# Altium PCB PCB.PcbDoc
Units mil, origin at the board's own origin, x right, y up, seen from the top; angles counter-clockwise.
Board outline 3149.61 x 3897.64 mil, 2 copper layers (Top Layer, Bottom Layer); 87 components, 90 nets, 304 pads, 46 vias.
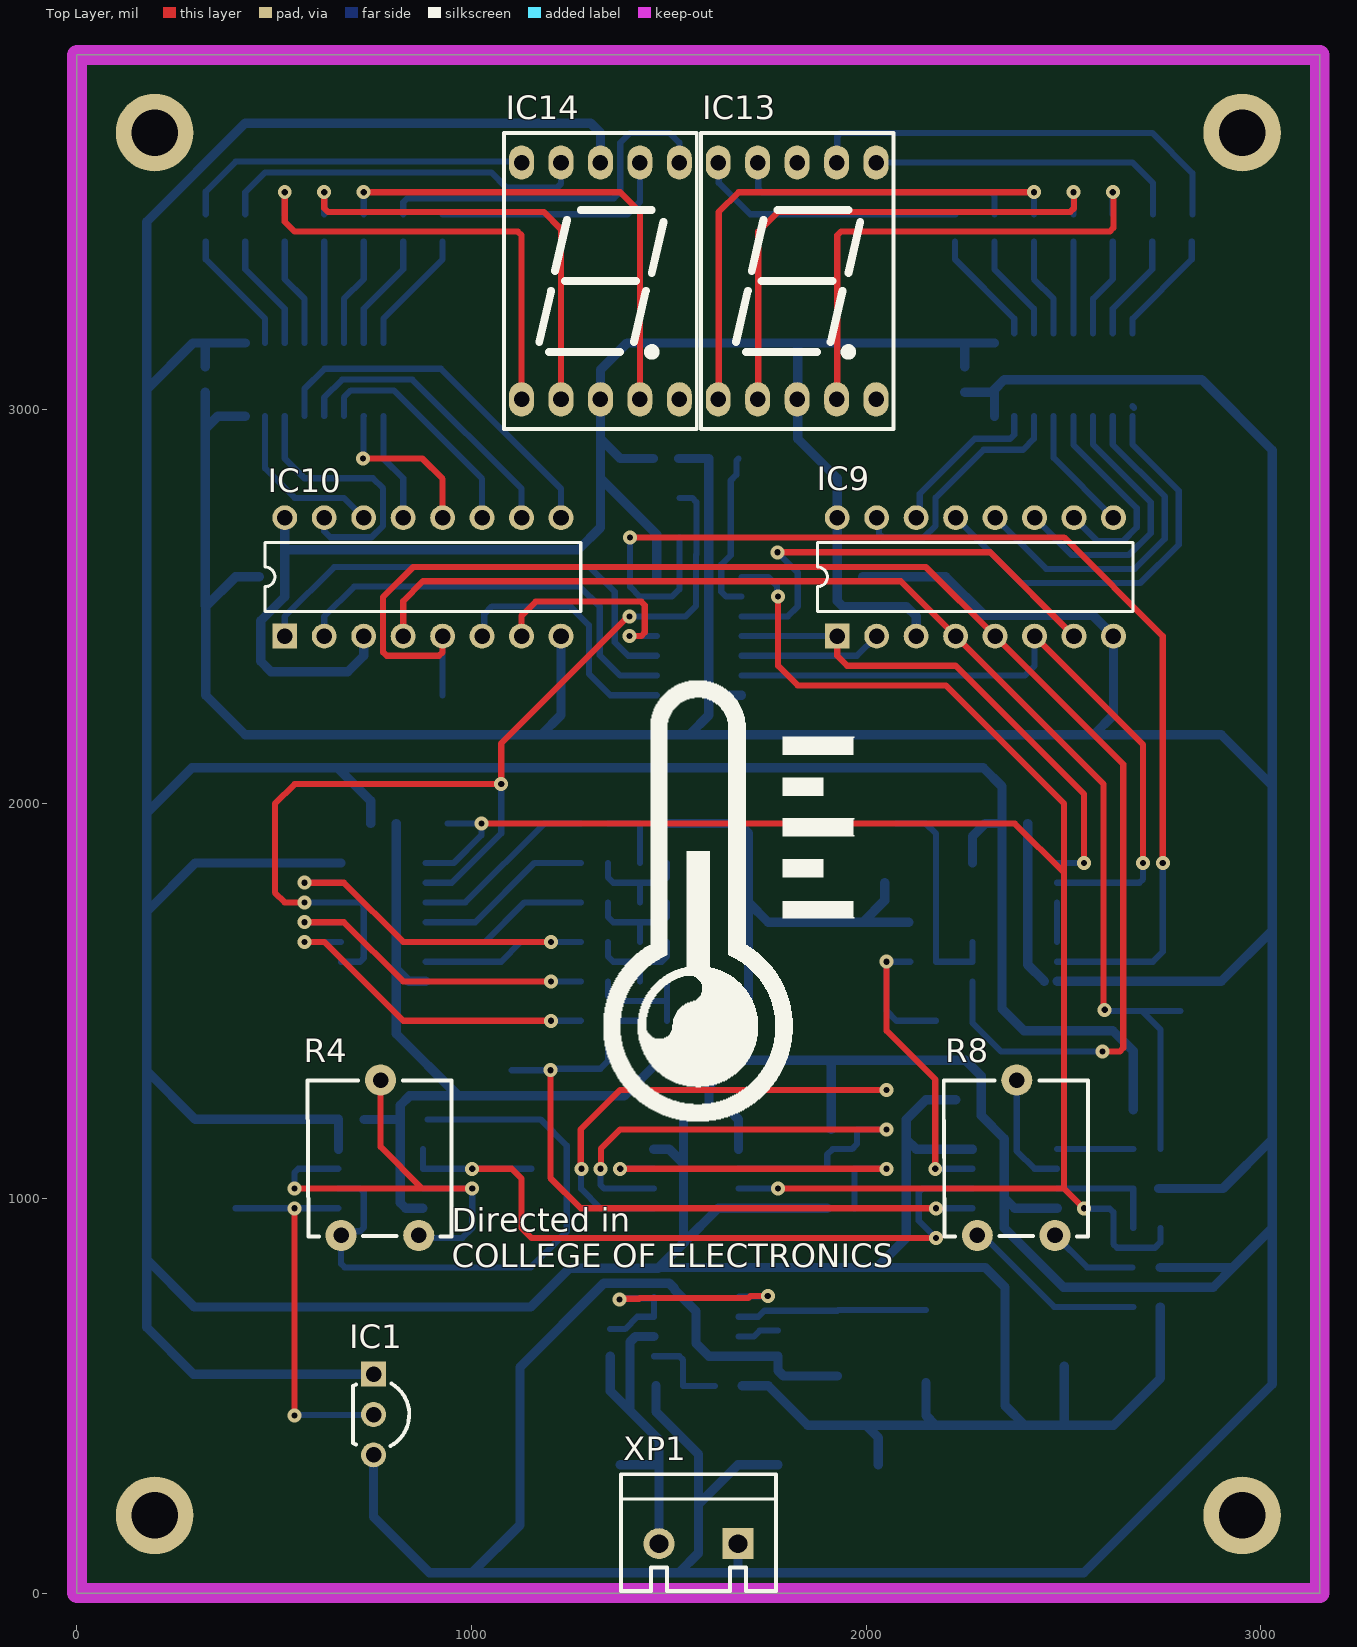
[diagram p0: Top Layer view]
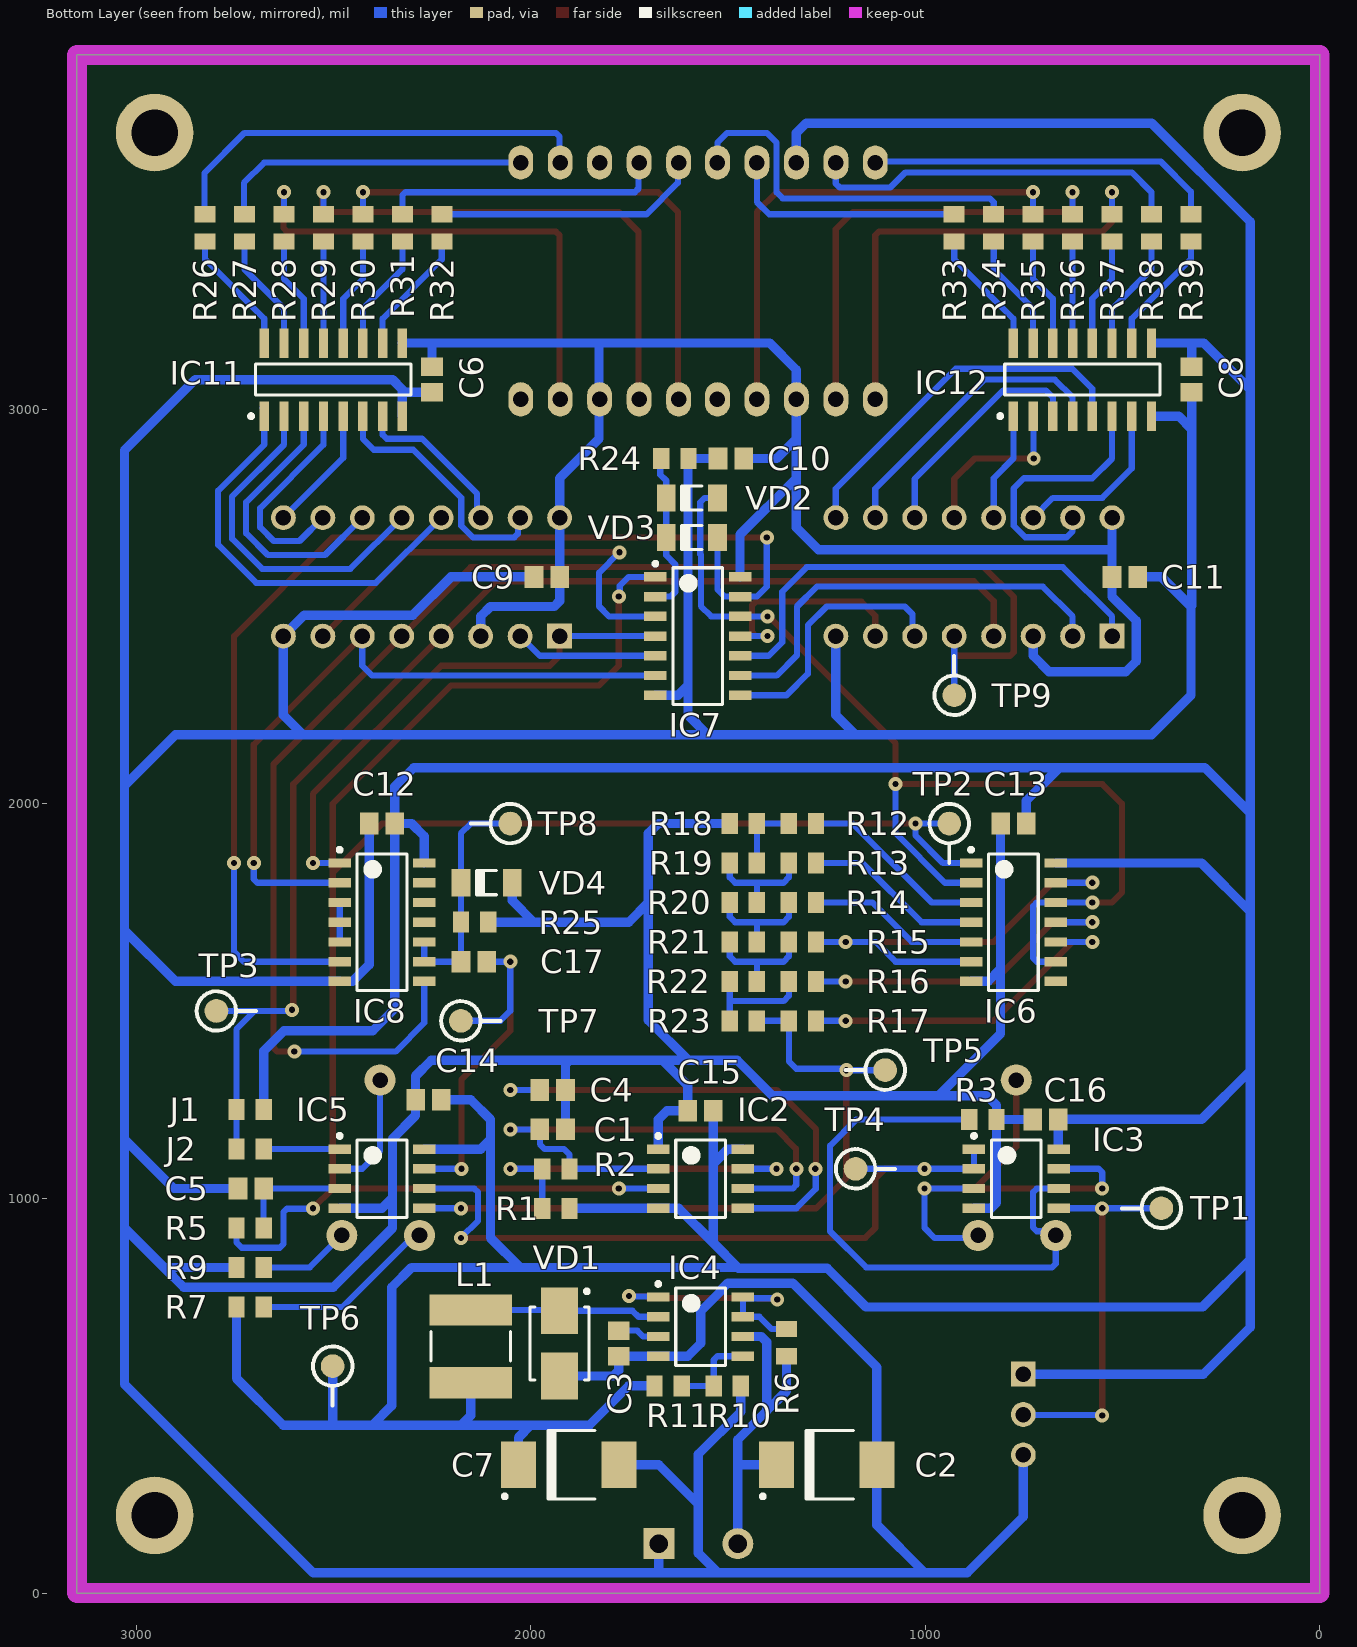
[diagram p1: Bottom Layer view, seen from below]
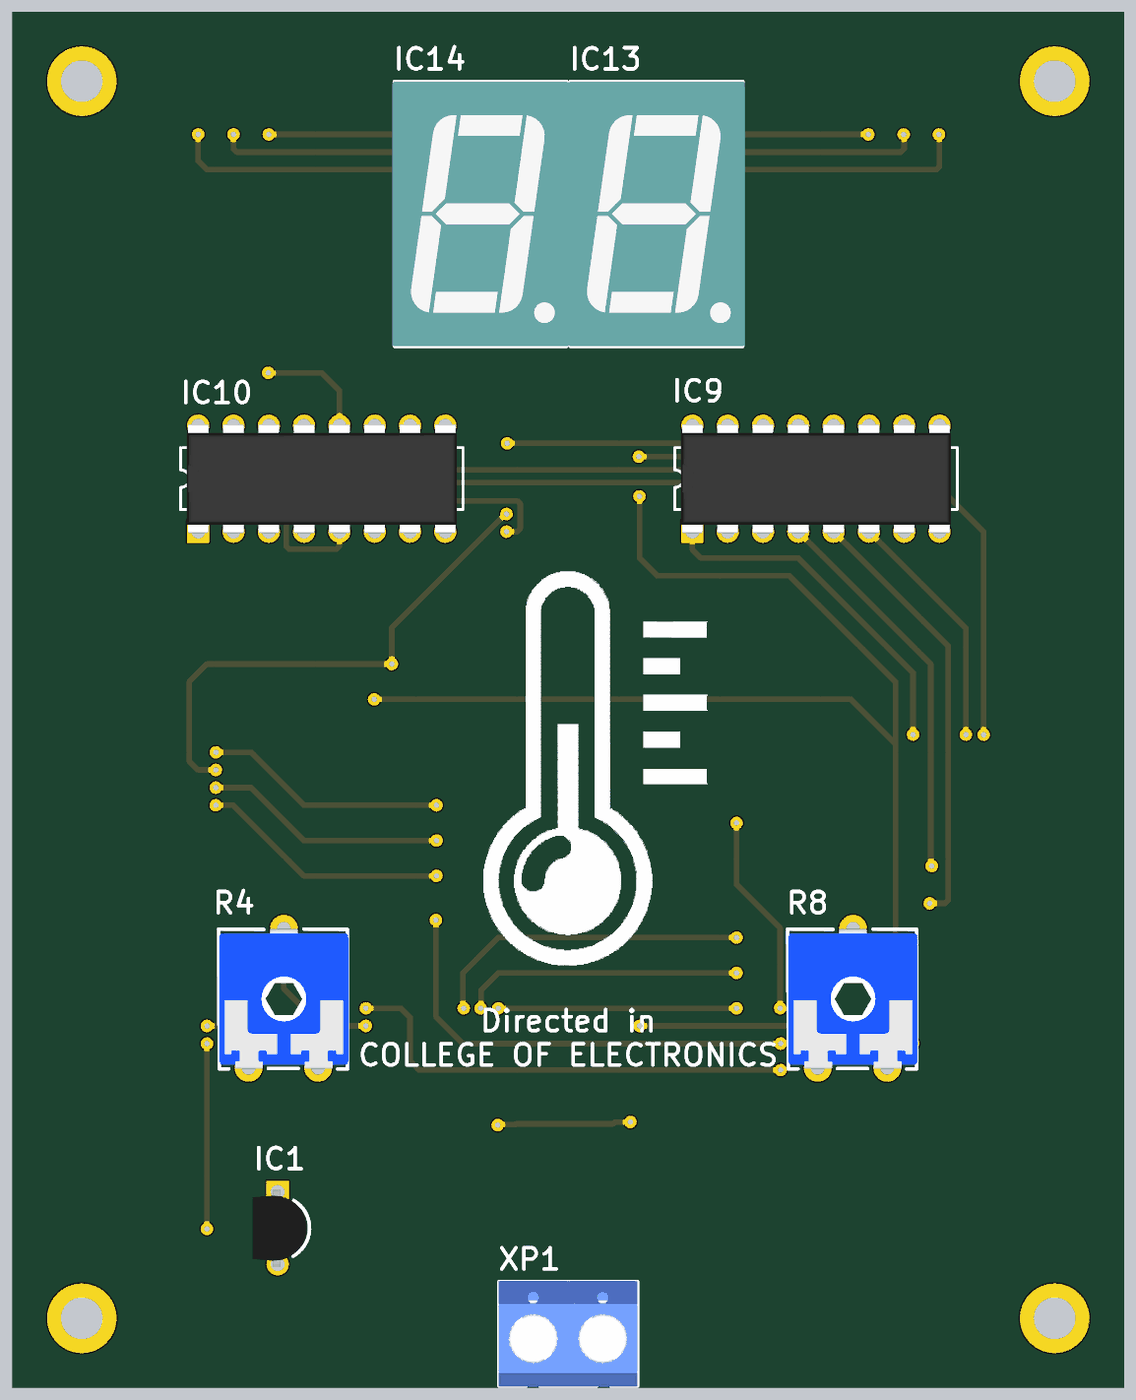
[diagram p2: 3D render of the assembled board from above, using the file's embedded part models]
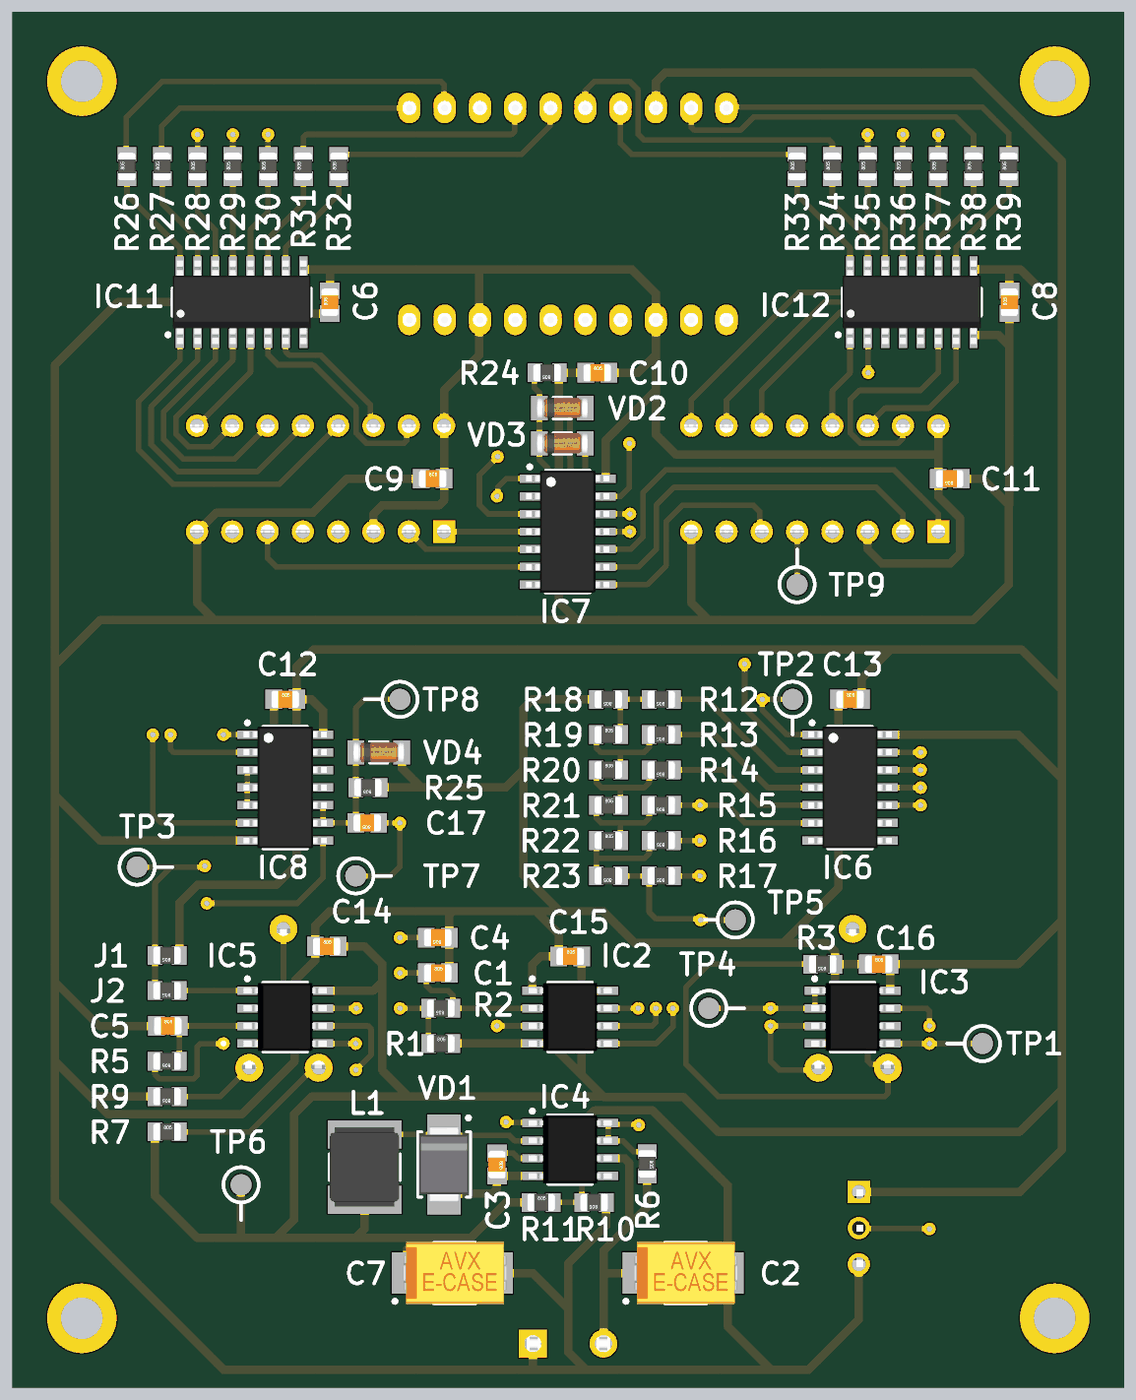
[diagram p3: 3D render of the assembled board from below, using the file's embedded part models]

## Layer stack, top to bottom
Top Solder: solder mask 0.4, Solder Resist, Dk 3.5
Top Layer: signal copper 1.4
Dielectric 1: dielectric 12.6, FR-4, Dk 4.8
Bottom Layer: signal copper 1.4
Bottom Solder: solder mask 0.4, Solder Resist, Dk 3.5

## Board outline
0,0 0,3897.64 3149.61,3897.64 3149.61,0

## Design rules (kind name [scope] priority, off if disabled: settings)
AcuteAngle [All] p1: minimum=6.00000000000000E+0001 checktracksonly=FALSE
BoardOutlineClearance [All] p1: gap=39.37 ignorepadtopadclearanceinfootprint=FALSE
Clearance Clearance_1 [InComponent('IC13') vs InComponent('IC14')] p1: gap=0 ignorepadtopadclearanceinfootprint=FALSE
Clearance [All] p2: gap=11.81 ignorepadtopadclearanceinfootprint=FALSE
HoleSize [All] p1: absolutevalues=TRUE maxlimit=39.37 minlimit=15.75 maxpercent=80.000 minpercent=20.000
MinimumAnnularRing [All] p1: minimumring=19.68
PolygonConnect [All] p1: connectstyle=Relief reliefconductorwidth=10 reliefentries=4 polygonreliefangle="90 Angle" airgapwidth=10
RoomDefinition Sheet1 [InComponentClass('Sheet1')] p1: confinementstyle=ConfineIn formatcopy=TRUE lockcomponents=FALSE outline 0,0 10200,0 10200,10400 0,10400
RoutingPriority RoutingPriority_1 [InNetClass('PWR')] p1: routingpriority=1
RoutingPriority [All] p2: routingpriority=0
RoutingTopology RoutingTopology_1 [InNetClass('PWR')] p1: topology=Daisy_Simple
RoutingTopology [All] p2: topology=Shortest
RoutingVias [All] p1: holewidth=15.75 width=35.43 viastyle="Through Hole" minholewidth=15.75 minwidth=35.43 maxholewidth=15.75 maxwidth=35.43
SMDEntry [All] p1: side=TRUE corner=FALSE anyangle=FALSE
SMDToCorner [All] p1: distance=98425
SolderMaskExpansion [All] p1: expansion=4 istentingtop=FALSE
UnRoutedNet [All] p1: checkbadconnections=TRUE
Width Width_PWR [InNetClass('PWR')] p1: maxlimit=23.62 minlimit=23.62 preferedwidth=23.62
Width [All] p2: maxlimit=15.75 minlimit=15.75 preferedwidth=15.75
26 further rules are at their usual default settings.

## Classes and differential pairs
net class PWR: GND VCC Vin

## Components (designator, comment, footprint, x,y, rotation, side; value= is the part's Value field where it differs from the comment)
C1 "0.1uF" CAP0805 1944.09,1175 r180 bottom
C2 "100uF" CAP-SMD-E 1241.57,325 r0 bottom
C3 "470pF" CAP0805 1776.57,632.48 r270 bottom
C4 "10n" CAP0805 1944.09,1275 r0 bottom
C5 "0.1uF" CAP0805 2709.05,1025 r180 bottom
C6 "0.1uF" CAP0805 2250,3075 r90 bottom
C7 "470uF" CAP-SMD-E 1895.67,325 r0 bottom
C8 "0.1uF" CAP0805 325,3075 r90 bottom
C9 "0.1uF" CAP0805 1959.06,2575 r180 bottom
C10 "0.1uF" CAP0805 1492.52,2875 r180 bottom
C11 "0.1uF" CAP0805 494.1,2575 r0 bottom
C12 "0.1uF" CAP0805 2376.57,1950 r180 bottom
C13 "0.1uF" CAP0805 776.57,1950 r180 bottom
C14 "0.1uF" CAP0805 2259.05,1250 r180 bottom
C15 "0.1uF" CAP0805 1569.29,1221.99 r180 bottom
C16 "0.1uF" CAP0805 695.38,1200.29 r180 bottom
C17 "0.1uF" CAP0805 2144.09,1600 r0 bottom
IC1 "LM35" TO92 751.57,452.36 r270 top
IC2 "NE555" SOIC8 1569.29,1050 r180 bottom
IC3 "LM358" SOIC8 769.29,1050 r180 bottom
IC4 "MC34063" SOIC8 1569.29,675 r180 bottom
IC5 "LM358" SOIC8 2376.57,1050 r180 bottom
IC6 "74393" SOIC-14(3.9mm) 776.57,1700 r180 bottom
IC7 "74393" SOIC-14(3.9mm) 1576.57,2425 r180 bottom
IC8 "7400" SOIC-14(3.9mm) 2376.57,1700 r180 bottom
IC9 "4511" DIP16 2276.57,2575 r90 top
IC10 "4511" DIP16 876.57,2575 r90 top
IC11 "ULN2003ADR" SOIC16 2500,3075 r90 bottom
IC12 "ULN2003ADR" SOIC16 601.57,3075 r90 bottom
IC13 "SA05-11EWA" SA05-11EWA 1825,3325 r0 top
IC14 "SA05-11EWA" SA05-11EWA 1326.57,3325 r0 top
J1 "Jumper" RES0805 2711.02,1225 r0 bottom
J2 "Jumper" RES0805 2711.02,1125 r0 bottom
L1 "220uH" LQH55 2151.57,625 r270 bottom
R1 "1.2K" RES0805 1936.02,975 r180 bottom
R2 "6.8K" RES0805 1936.02,1075 r0 bottom
R3 "1K" RES0805 853.74,1200 r0 bottom
R4 "10k" POT 769.29,1106.3 r0 top
R5 "10K" RES0805 2711.02,925 r0 bottom
R6 "0.33" RES0805 1351.57,634.45 r270 bottom
R7 "15K" RES0805 2711.02,725 r180 bottom
R8 "10k" POT 2381.57,1106.3 r0 top
R9 "15K" RES0805 2711.02,825 r0 bottom
R10 "1.2K" RES0805 1501.57,525 r0 bottom
R11 "3.8K" RES0805 1651.57,525 r180 bottom
R12 "2K" RES0805 1311.02,1950 r0 bottom
R13 "2K" RES0805 1311.02,1850 r0 bottom
R14 "2K" RES0805 1311.02,1750 r0 bottom
R15 "2K" RES0805 1311.02,1650 r0 bottom
R16 "2K" RES0805 1311.02,1550 r0 bottom
R17 "2K" RES0805 1311.02,1450 r0 bottom
R18 "2K" RES0805 1461.02,1950 r0 bottom
R19 "1K" RES0805 1461.02,1850 r180 bottom
R20 "1K" RES0805 1461.02,1750 r180 bottom
R21 "1K" RES0805 1461.02,1650 r180 bottom
R22 "1K" RES0805 1461.02,1550 r180 bottom
R23 "1K" RES0805 1461.02,1450 r0 bottom
R24 "1K" RES0805 1634.45,2875 r0 bottom
R25 "10K" RES0805 2142.13,1700 r0 bottom
R26 "220" RES0805 2825,3459.45 r90 bottom
R27 "220" RES0805 2725,3459.45 r90 bottom
R28 "220" RES0805 2625,3459.45 r90 bottom
R29 "220" RES0805 2525,3459.45 r90 bottom
R30 "220" RES0805 2425,3459.45 r90 bottom
R31 "220" RES0805 2325,3459.45 r90 bottom
R32 "220" RES0805 2225,3459.45 r90 bottom
R33 "220" RES0805 926.57,3459.45 r90 bottom
R34 "220" RES0805 826.57,3459.45 r90 bottom
R35 "220" RES0805 726.57,3459.45 r90 bottom
R36 "220" RES0805 626.57,3459.45 r90 bottom
R37 "220" RES0805 526.57,3459.45 r90 bottom
R38 "220" RES0805 426.57,3459.45 r90 bottom
R39 "220" RES0805 326.57,3459.45 r90 bottom
TP1 "TestPoint" TP 401.57,975 r0 bottom
TP2 "TestPoint" TP 939.07,1950 r270 bottom
TP3 "TestPoint" TP 2796.14,1475 r180 bottom
TP4 "TestPoint" TP 1176.57,1075 r180 bottom
TP5 "TestPoint" TP 1101.58,1325 r0 bottom
TP6 "TestPoint" TP 2501.57,575 r270 bottom
TP7 "TestPoint" TP 2176.57,1450 r180 bottom
TP8 "TestPoint" TP 2051.57,1950 r0 bottom
TP9 "TestPoint" TP 926.57,2275 r90 bottom
VD1 "10BQ040" DIODESMB 1926.57,632.68 r270 bottom
VD2 "LL4148" DIOMELF 1591.54,2775 r0 bottom
VD3 "LL4148" DIOMELF 1591.54,2675 r0 bottom
VD4 "LL4148" DIOMELF 2111.61,1800 r0 bottom
XP1 "XP" XP 1575,125 r0 top

## Footprints (in the part's own frame and the unit in brackets; to place one, negate y for a bottom-side part, rotate by r counter-clockwise, add the part's x,y. Pads: shape width x height; smd on the part's side, far side on the other; paste and mask are expansions set on the pad)
CAP0805 [mm]
  rect 1.2x1.4 smd: 1(-0.825,0) 2(0.825,0)
  body extent -1,-0.62 1,0.63, height 0.78
CAP-SMD-E [mm]
  rect 2.25x3 smd: A(3.429,0) C(-3.025,0)
  silkscreen extent -1.5,-2.2 4.44,2.2, body extent -3.7,-2.23 3.7,2.22, height 4.2
DIODESMB [mm] "Molded Diode, 2-Leads, Body 4,40x3,55mm, IPC Medium Density"
  rect 3x2.4 smd: A(2.1,0) C(-2.1,0)
  silkscreen extent -3.47,-1.9 2.35,1.9, body extent -2.7,-1.8 2.7,1.8, height 2.3
DIOMELF [mm]
  rect 1.2x1.75 smd: A(-1.65,0) C(1.65,0)
  silkscreen extent -0.65,-0.78 0.65,0.78, body extent -1.85,-0.8 1.85,0.8
DIP16 [mm]
  rect 1.6x1.6 hole 1: 1(-3.81,8.89)
  round 1.6 hole 1: 2(-3.81,6.35) 3(-3.81,3.81) 4(-3.81,1.27) 5(-3.81,-1.27) 6(-3.81,-3.81) 7(-3.81,-6.35) 8(-3.81,-8.89) 9(3.81,-8.89) 10(3.81,-6.35) 11(3.81,-3.81) 12(3.81,-1.27) 13(3.81,1.27) 14(3.81,3.81) 15(3.81,6.35) 16(3.81,8.89)
  silkscreen extent -2.22,-10.16 2.22,10.16, body extent -3.91,-9.71 3.91,9.71, height 4.57
LQH55 [mm]
  rect 2.01x5.32 smd: 1(-2.345,0) 2(2.345,0)
  silkscreen extent -0.95,-2.56 0.95,2.56, body extent -2.85,-2.5 2.85,2.5, height 4.7
POT [mm]
  round 2 hole 1: 1(-2.54,-5.08) 2(2.46,-5.08) 3(0,4.92)
  silkscreen extent -4.7,-5.16 4.57,4.9, body extent -4.63,-5.15 4.63,4.9, height 7.1
RES0805 [mm] "Chip Resistor, 2-Leads, Body 2,00x1,25mm, IPC Medium Density"
  rect 1.05x1.35 smd: 1(-0.875,0) 2(0.875,0)
  body extent -1,-0.63 1,0.62, height 0.78
SA05-11EWA [mm]
  oval 1.6x2.2 hole 1: 1(-5.08,-7.62) 2(-2.54,-7.62) 4(2.54,-7.62) 5(5.08,-7.62) 6(5.08,7.62) 7(2.54,7.62) 9(-2.54,7.62) 10(-5.08,7.62) A(0,-7.62) A(0,7.62)
  silkscreen extent -6.2,-9.53 6.2,9.53, body extent -6.35,-9.52 6.35,9.53, height 8.2
SOIC8 [mm]
  rect 1.45x0.6 smd: 1(-2.725,1.905) 2(-2.725,0.635) 3(-2.725,-0.635) 4(-2.725,-1.905) 5(2.725,-1.905) 6(2.725,-0.635) 7(2.725,0.635) 8(2.725,1.905)
  silkscreen extent -2.85,-2.5 1.6,2.88, body extent -3,-2.45 3,2.45, height 1.66
SOIC16 [mm]
  rect 1.9x0.6 smd: 1(-2.35,4.445) 2(-2.35,3.175) 3(-2.35,1.905) 4(-2.35,0.635) 5(-2.35,-0.635) 6(-2.35,-1.905) 7(-2.35,-3.175) 8(-2.35,-4.445) 9(2.35,-4.445) 10(2.35,-3.175) 11(2.35,-1.905) 12(2.35,-0.635) 13(2.35,0.635) 14(2.35,1.905) 15(2.35,3.175) 16(2.35,4.445)
  silkscreen extent -2.47,-5 1,5.42, body extent -3,-4.97 3,4.96, height 1.62
SOIC-14(3.9mm) [mm]
  rect 1.45x0.6 smd: 1(-2.725,3.81) 2(-2.725,2.54) 3(-2.725,1.27) 4(-2.725,0) 5(-2.725,-1.27) 6(-2.725,-2.54) 7(-2.725,-3.81) 8(2.725,-3.81) 9(2.725,-2.54) 10(2.725,-1.27) 11(2.725,0) 12(2.725,1.27) 13(2.725,2.54) 14(2.725,3.81)
  silkscreen extent -2.85,-4.4 1.6,4.78, body extent -3,-4.37 3,4.38, height 1.75
TO92 [mm]
  rect 1.6x1.6 hole 1: 1(-2.6,0)
  round 1.6 hole 1: 2(0,0) 3(2.6,0)
  silkscreen extent -1.99,-1.33 2.02,2.3, body extent -2.8,-1.82 2.8,2.11, height 9.9
TP [mil]
  round 60 smd: 0(0,0)
  silkscreen extent -50,-50 100,50
XP [mm]
  rect 2x2 hole 1.2: G(2.54,0)
  round 2 hole 1.2: V(-2.54,0)
  silkscreen extent -4.98,-3.05 4.98,4.47, body extent -5.02,-3.09 4.98,4.51, height 9.8

## Part data
C1 C3 C4 C5 C6 C8 C9 C10 C11 C12 C13 C14 C15 C16 C17: library part Cap0805
C2 C7: library part Cap+
J1 J2: library part Jumper0805
L1: library part Coil
R1 R2 R3 R5 R6 R7 R9 R10 R11 R12 R13 R14 R15 R16 R17 R18 R19 R20 R21 R22 R23 R24 R25 R26 R27 R28 R29 R30 R31 R32 R33 R34 R35 R36 R37 R38 R39: library part Res0805
R4 R8: library part POT
VD1: library part 10BQ040(diode)
VD2 VD3 VD4: library part LL4148(diode)

## Free pads (board coordinates)
  round 196.85 hole 118.11: ""(196.85,196.85) ""(196.85,3700.79) ""(2952.76,196.85) ""(2952.76,3700.79)

## Via types
v1: diameter 35.43, hole 15.75, Top Layer to Bottom Layer, 46 vias

## Nets (pads, with @x,y where several pads share a name; then routed paths per layer and width w, separated by ;. In a path a pad name is that pad's centre, name@x,y a point inside that pad or via, vN(x,y) a via of type N, cw(c..) or ccw(c..) an arc to the next point about the centre after c; other vN are vias at no path point)
CLK: IC2.3 IC6.1 IC7.1 R5.2 TP2.0 | length 5182.8
  Top Layer w15.75: v1(1025,1950) 2376.57,1950 2501.57,1825 ; v1(1776.57,1025) 2501.57,1025 ; v1(1776.57,2525) 1776.57,2350 1826.57,2300 2201.57,2300 2501.57,2000 2501.57,1825 ; v1(2551.57,975) 2501.57,1025 ; 2501.57,1025 2501.57,1825
  Bottom Layer w15.75: IC6.1 955.12,1850 1025,1919.88 v1(1025,1950) TP2.0 ; IC2.3 v1(1776.57,1025) ; IC7.1 1751.57,2575 1774.01,2552.56 1774.01,2527.56 v1(1776.57,2525) ; v1(2551.57,975) 2552.56,974.02 2617.35,974.02 2626.57,964.79 2626.57,884.23 2635.8,875 2731.89,875 2745.47,888.58 R5.2
CLR: IC6.2 IC6.9 IC6.12 IC7.12 VD2.A | length 2671.1
  Top Layer w15.75: v1(576.57,1750) 526.57,1750 501.57,1775 501.57,2000 551.57,2050 v1(1075,2050) 1075,2152.89 1397.11,2475 v1(1400,2475)
  Bottom Layer w15.75: v1(576.57,1750) IC6.12 717.35,1750 726.57,1740.78 726.57,1609.23 717.35,1600 IC6.9 ; IC6.2 950,1800 1075,1925 v1(1075,2050) ; v1(1400,2475) IC7.12 1542.35,2475 1568.5,2501.15 1568.5,2631.02 1569.88,2632.4 1569.88,2764.4 1559.28,2775 VD2.A
CLR(dec): IC7.13 IC8.6 VD3.A | length 2930.9
  Top Layer w15.75: v1(1401.57,2675) 2501.57,2675 2751.57,2425 v1(2751.57,1850)
  Bottom Layer w15.75: v1(1401.57,2675) 1401.57,2550 1426.57,2525 1507.68,2525 1526.57,2543.9 VD3.A ; IC8.6 2726.57,1600 2751.57,1625 v1(2751.57,1850)
DAC: IC5.5 R17.2 R23.1 TP5.0 | length 1811.2
  Top Layer w15.75: v1(1200,1325) 1200,1051.57 1276.57,975 v1(2176.57,975)
  Bottom Layer w15.75: TP5.0 v1(1200,1325) 1203.77,1328.77 1326.64,1328.77 1345.47,1347.6 R17.2 R23.1 ; v1(2176.57,975) IC5.5
EN: IC8.8 IC9.5 IC10.5 TP9.0 | length 3843.4
  Top Layer w15.75: IC10.5 926.57,2384.22 917.35,2375 785.01,2375 775.79,2384.22 775.79,2524.21 851.57,2600 2151.57,2600 IC9.5 2651.57,2100 2651.57,1381.39 2642.35,1372.16 v1(2598.74,1372.16)
  Bottom Layer w15.75: TP9.0 IC10.5 ; IC8.8 2269.29,1445.03 2342.16,1372.16 v1(2598.74,1372.16)
GND: C1.2 C2.C C3.2 C4.1 C5.1 C6.1 C7.C C8.1 C9.1 C10.1 C11.1 C12.1 C13.1 C14.1 C15.1 C16.1 IC1.3 IC2.1 IC3.4 IC4.4 IC5.4 IC6.7 IC7.7 IC8.7 IC9.8 IC10.8 IC11.8 IC12.8 R3.1 R9.2 R10.1 R18.2 R24.1 R25.1 VD1.A VD4.A XP1.G | length 22007.6
  Bottom Layer w23.62: C8.1 325,2950 ; IC12.8 357.48,2982.48 325,2950 ; C11.1 401.57,2575 326.57,2500 ; C16.1@728.15,1200 R3.1 ; IC1.3 751.57,193.11 893.5,51.18 1001.18,51.18 ; C13.1 809.05,1581.36 ; IC3.4 833.13,975 819.29,988.84 R3.1 ; IC6.7 840.41,1550 809.05,1581.36 ; IC10.8 1226.57,2225 1176.57,2175 ; R10.1 1467.13,459.45 1575,351.57 1575,225 ; R18.2 1676.57,1950 1701.57,1925 1701.57,1750 ; C10.1 R24.1 ; R24.1@1601.38,2875 1601.38,2300.2 ; XP1.G 1675,51.18 ; IC2.1 1676.57,1200 1654.59,1221.99 C15.1 1601.77,1286.16 1665.61,1350 ; IC7.7 1626.57,2275 1601.38,2300.2 ; C7.C 1675,325 1575,225 ; C1.2 C4.1 1911.61,1339.96 1901.57,1350 ; VD1.A 1790.41,550 1776.57,563.84 C3.2 IC4.4 1601.57,600 1568.85,632.72 1568.85,714.13 1514.17,768.81 1514.17,771.6 1500.33,785.43 1335.43,785.43 1122.48,572.48 C2.C 1122.48,172.48 1001.18,51.18 ; C9.1 2201.57,2575 2298.42,2478.15 2573.42,2478.15 IC9.8 2626.57,2225 2576.57,2175 ; VD4.A 2046.65,1754.92 1991.73,1700 ; R25.1 1991.73,1700 ; C6.1 2317.52,3042.52 2325,3050 ; IC11.8 2325,3050 ; C12.1 2409.05,1592.52 2451.57,1550 ; IC5.4 2376.57,975 2350.08,1001.5 ; IC8.7 2900,1550 3029.16,1679.16 ; C5.1 2904.16,1025 3029.16,1150 ; R9.2 2929.16,825 ; 325,2950 325,2501.57 326.57,2500 ; 326.57,2500 326.57,2275 426.57,2175 1176.57,2175 ; 809.05,1581.36 809.05,1417.52 966.79,1259.78 ; R3.1 819.29,1236.42 842.66,1259.78 966.79,1259.78 ; 966.79,1259.78 1386.36,1259.78 1476.57,1350 1600,1350 ; 1001.18,51.18 1525,51.18 ; 1176.57,2175 1551.57,2175 ; 1525,51.18 1675,51.18 ; 1525,51.18 1575,101.18 1575,225 ; 1551.57,2175 1601.38,2224.8 1601.38,2300.2 ; 1551.57,2175 2576.57,2175 ; 1600,1350 1701.57,1451.57 1701.57,1750 ; 1600,1350 1665.61,1350 ; 1665.61,1350 1901.57,1350 ; 1675,51.18 2551.18,51.18 3029.16,529.16 3029.16,925 ; 1701.57,1750 1751.57,1700 1991.73,1700 ; 1901.57,1350 2251.57,1350 2291.53,1310.04 C14.1 2291.53,1210.04 2350.08,1151.5 2350.08,1001.5 ; 2325,3050 2350,3075 2850,3075 3029.16,2895.84 3029.16,2045.84 ; 2350.08,1001.5 2350.08,924.92 2500,775 2879.16,775 2929.16,825 ; 2576.57,2175 2900,2175 3029.16,2045.84 ; 2929.16,825 3029.16,925 ; 3029.16,925 3029.16,1150 ; 3029.16,1150 3029.16,1679.16 ; 3029.16,1679.16 3029.16,2045.84
NetC1_1: C1.1 IC2.2 IC2.6 R2.1 | length 1435.3
  Top Layer w15.75: v1(1326.63,1075.05) 1327.61,1076.04 1327.61,1126.04 1376.57,1175 v1(2051.57,1175)
  Bottom Layer w15.75: v1(1326.63,1075.05) 1326.63,1034.22 1335.85,1025 IC2.6 ; IC2.2 R2.1 1901.57,1111.42 1915.16,1125 1963.98,1125 1976.57,1137.6 C1.1 v1(2051.57,1175)
NetC3_1: C3.1 IC4.3 | length 106.2
  Bottom Layer w15.75: IC4.3 1714.96,650 1729.92,664.96 C3.1
NetC4_2: C4.2 IC2.5 | length 1248.4
  Top Layer w15.75: v1(1278.54,1075) 1276.57,1076.97 1276.57,1175 1376.57,1275 v1(2051.57,1275)
  Bottom Layer w15.75: v1(1278.54,1075) 1277.56,1074.01 1277.56,1024.02 1326.57,975 IC2.5 ; C4.2 v1(2051.57,1275)
NetC5_2: C5.2 IC5.3 R5.1 | length 292.7
  Bottom Layer w15.75: IC5.3 C5.2 R5.1
NetC17_1: C17.1 IC5.7 TP7.0 | length 990.8
  Top Layer w15.75: v1(2051.57,1600) 2051.57,1425 2175,1301.57 v1(2175,1075)
  Bottom Layer w15.75: C17.1 v1(2051.57,1600) 2051.57,1475 2076.57,1450 TP7.0 ; v1(2175,1075) IC5.7
NetC17_2: C17.2 IC8.9 IC8.10 R25.2 TP8.0 VD4.C | length 578.1
  Bottom Layer w15.75: TP8.0@2076.57,1950 2151.57,1950 2176.57,1925 VD4.C R25.2 C17.2 IC8.9 IC8.10
NetIC1_2: IC1.2 IC3.5 TP1.0 | length 986.4
  Top Layer w15.75: v1(551.57,450) v1(551.57,975)
  Bottom Layer w15.75: TP1.0 v1(551.57,975) IC3.5 ; v1(551.57,450) 552.76,451.18 750.39,451.18 IC1.2
NetIC2_7: IC2.7 R1.1 R2.2 | length 941.5
  Top Layer w15.75: v1@1376.66,1074.97 v1@2051.55,1074.97
  Bottom Layer w15.75: v1@1376.66,1074.97 IC2.7 ; R1.1 R2.2 v1(2051.57,1075)
  other v1: 1376.63,1074.94
NetIC3_3: IC3.3 IC3.7 R4.2 R4.3 | length 1297.2
  Top Layer w15.75: v1(551.57,1025) 875,1025 ; R4.3 769.29,1130.71 875,1025 ; v1(1001.57,1025) 875,1025
  Bottom Layer w15.75: v1(551.57,1025) 551.57,1065.78 560.8,1075 IC3.7 ; R4.2 872.44,900 976.57,900 1001.57,925 v1(1001.57,1025) IC3.3
NetIC3_6: IC3.6 R3.2 R4.1 | length 1507.1
  Bottom Layer w15.75: IC3.6 717.35,1025 726.57,1015.77 726.57,926.15 717.35,916.93 679.92,916.93 R4.1 669.29,834.23 678.52,825 1150,825 1241.14,916.14 1241.14,1133.86 1175,1200 R3.2
NetIC4_1: IC4.1 IC4.7 IC4.8 R6.1 | length 717.5
  Top Layer w15.75: v1(1375,744.09) 1376.77,745.87 1424.21,745.87 1425.79,747.44 1701.57,747.44 1706.89,752.76 v1(1750.79,752.76)
  Bottom Layer w15.75: R6.1 1388.98,668.9 1420.08,700 IC4.7 IC4.8 1459.05,747.05 1377.95,747.05 v1(1375,744.09) ; IC4.1 1677.95,751.38 1749.41,751.38 v1(1750.79,752.76)
NetIC4_2: IC4.2 L1.1 VD1.C | length 482.2
  Bottom Layer w15.75: IC4.2 1726.57,700 1741.93,715.36 VD1.C 1928.54,717.32 L1.1
NetIC4_5: IC4.5 R10.2 R11.2 | length 224.6
  Bottom Layer w15.75: IC4.5 1526.57,600 1536.02,590.55 R10.2 R11.2
NetIC5_1: IC5.1 J2.1 | length 192.7
  Bottom Layer w15.75: IC5.1 J2.1
NetIC5_2: IC5.2 R8.3 | length 300.9
  Bottom Layer w15.75: R8.3 2381.57,1120 2426.57,1075 IC5.2
NetIC6_3: IC6.3 R12.1 | length 475.6
  Bottom Layer w15.75: IC6.3 984.15,1750 1184.15,1950 R12.1
NetIC6_4: IC6.4 R13.1 | length 454.8
  Bottom Layer w15.75: IC6.4 1009.15,1700 1159.15,1850 R13.1
NetIC6_5: IC6.5 R14.1 | length 434.1
  Bottom Layer w15.75: IC6.5 1034.15,1650 1134.15,1750 R14.1
NetIC6_6: IC6.6 IC6.13 R15.1 | length 1193.3
  Top Layer w15.75: v1(576.57,1800) 676.57,1800 826.57,1650 v1(1201.57,1650)
  Bottom Layer w15.75: v1(576.57,1800) IC6.13 ; IC6.6 1075,1600 1125,1650 v1(1201.57,1650) R15.1
NetIC6_10: IC6.10 R17.1 | length 875.6
  Top Layer w15.75: v1(576.57,1650) 626.57,1650 826.57,1450 v1(1201.57,1450)
  Bottom Layer w15.75: v1(576.57,1650) IC6.10 ; v1(1201.57,1450) R17.1
NetIC6_11: IC6.11 R16.1 | length 854.8
  Top Layer w15.75: v1(576.57,1700) 676.57,1700 826.57,1550 v1(1201.57,1550)
  Bottom Layer w15.75: v1(576.57,1700) IC6.11 ; v1(1201.57,1550) R16.1
NetIC7_2: IC7.2 R24.2 VD2.C VD3.C | length 411.7
  Bottom Layer w15.75: R24.2@1676.57,2875 1671.23,2869.66 1671.23,2834.03 1656.5,2819.29 VD3.C 1656.5,2629.92 1632.87,2606.3 1632.87,2537.6 1645.47,2525 IC7.2
NetIC7_3: IC7.3 IC9.7 | length 1151.4
  Top Layer w15.75: v1(1775,2637.4) 2314.17,2637.4 IC9.7
  Bottom Layer w15.75: IC7.3 1801.57,2475 1826.57,2500 1826.57,2585.83 v1(1775,2637.4)
NetIC7_4: IC7.4 IC8.1 IC9.1 | length 1305.4
  Top Layer w15.75: IC9.1 1926.57,2375 1951.57,2350 2226.57,2350 2551.57,2025 v1(2551.57,1850)
  Bottom Layer w15.75: IC7.4 IC9.1 ; IC8.1 v1(2551.57,1850)
NetIC7_5: IC7.5 IC9.2 | length 363.4
  Bottom Layer w15.75: IC7.5 1976.57,2375 IC9.2
NetIC7_6: IC7.6 IC8.2 IC9.6 | length 1779.3
  Top Layer w15.75: IC9.6 2701.57,2150 v1(2701.57,1850)
  Bottom Layer w15.75: IC7.6 2401.57,2325 2426.57,2350 IC9.6 ; IC8.2 2692.35,1800.03 2701.57,1809.25 v1(2701.57,1850)
NetIC7_8: IC7.8 IC10.6 | length 668.6
  Bottom Layer w15.75: IC10.6 1032.25,2430.68 1032.25,2480.68 1051.57,2500 1250,2500 1297.44,2452.56 1297.44,2329.13 1351.57,2275 IC7.8
NetIC7_9: IC7.9 IC10.2 | length 1089.8
  Bottom Layer w15.75: IC10.2 626.57,2475 702.16,2550.59 1274.41,2550.59 1325,2500 1325,2376.57 1376.57,2325 IC7.9
NetIC7_10: IC7.10 IC10.1 | length 1212.6
  Bottom Layer w15.75: IC10.1 526.57,2475 651.57,2600 1300,2600 1362.6,2537.4 1362.6,2409.51 1397.11,2375 IC7.10
NetIC7_11: IC7.11 IC10.7 | length 563.7
  Top Layer w15.75: IC10.7 1126.57,2476.57 1162.4,2512.4 1429.75,2512.4 1438.98,2503.18 1438.98,2434.22 1429.75,2425 v1(1400,2425)
  Bottom Layer w15.75: v1(1400,2425) IC7.11
NetIC8_3: IC8.3 IC8.4 IC8.5 | length 100
  Bottom Layer w15.75: IC8.5 IC8.4 IC8.3
NetIC9_9: IC9.9 IC11.5 | length 320.3
  Bottom Layer w15.75: IC11.5 2475,2876.57 IC9.9
NetIC9_10: IC9.10 IC11.4 | length 546.3
  Bottom Layer w15.75: IC11.4 2525,2910.09 2685.63,2749.46 2685.63,2700.54 2651.04,2665.94 2585.63,2665.94 IC9.10
NetIC9_11: IC9.11 IC11.3 | length 713.7
  Bottom Layer w15.75: IC9.11 2521.06,2630.51 2665.71,2630.51 2721.06,2685.86 2721.06,2764.14 2575,2910.2 IC11.3
NetIC9_12: IC9.12 IC11.2 | length 881
  Bottom Layer w15.75: IC9.12 2456.5,2595.08 2680.39,2595.08 2756.5,2671.18 2756.5,2778.82 2625,2910.31 IC11.2
NetIC9_13: IC9.13 IC11.1 | length 1053.9
  Bottom Layer w15.75: IC9.13 2391.93,2559.65 2695.07,2559.65 2791.93,2656.51 2791.93,2793.49 2675,2910.42 IC11.1 ; IC11.1@2675,3007.48 IC11.1@2678.94,3003.54
NetIC9_14: IC9.14 IC11.7 | length 413
  Bottom Layer w15.75: IC9.14 2135.61,2734.04 2135.61,2785.61 2275,2925 2364.76,2925 2375,2935.24 IC11.7
NetIC9_15: IC9.15 IC11.6 | length 642.4
  Bottom Layer w15.75: IC9.15 2032.25,2719.32 2032.25,2684.22 2041.48,2675 2146.17,2675 2175.79,2704.62 2175.79,2775.79 2297.44,2897.44 2397.44,2897.44 2425,2925 IC11.6
NetIC10_9: IC10.9 IC12.5 | length 939.6
  Bottom Layer w15.75: IC12.5 576.57,3051.57 627.56,3102.56 922.44,3102.56 1226.57,2798.43 IC10.9
NetIC10_10: IC10.10 IC12.4 | length 754
  Bottom Layer w15.75: IC12.4 626.57,3029.72 671.85,3075 850,3075 1126.57,2798.43 IC10.10
NetIC10_11: IC10.11 IC12.3 | length 595.8
  Bottom Layer w15.75: IC12.3 676.57,3029.72 694.29,3047.44 802.56,3047.44 1026.57,2823.43 IC10.11
NetIC10_12: IC10.12 IC12.2 | length 429.5
  Top Layer w15.75: v1(725,2875) 875,2875 926.57,2823.43 IC10.12
  Bottom Layer w15.75: v1(725,2875) 725.79,2875.79 725.79,2981.69 IC12.2
NetIC10_13: IC10.13 IC12.1 | length 278.2
  Bottom Layer w15.75: IC12.1 776.57,2875 826.57,2825 IC10.13
NetIC10_14: IC10.14 IC12.7 | length 434.3
  Bottom Layer w15.75: IC12.7 476.57,2850 551.57,2775 676.57,2775 IC10.14
NetIC10_15: IC10.15 IC12.6 | length 684.9
  Bottom Layer w15.75: IC12.6 526.57,2875 576.57,2825 750,2825 775.79,2799.21 775.79,2704.62 746.44,2675.27 641.74,2675.27 626.57,2690.43 IC10.15
NetIC11_10: IC11.10 R32.1 | length 294.6
  Bottom Layer w15.75: R32.1 2225,3379.63 2375,3229.63 IC11.10@2375,3192.52
NetIC11_11: IC11.11 R31.1 | length 273.9
  Bottom Layer w15.75: R31.1 2325,3354.63 2425,3254.63 IC11.11@2425,3192.52
NetIC11_12: IC11.12 R30.1 | length 253.2
  Bottom Layer w15.75: R30.1 2425,3329.63 2475,3279.63 IC11.12@2475,3192.52
NetIC11_13: IC11.13 R29.1 | length 232.5
  Bottom Layer w15.75: IC11.13@2525,3192.52 R29.1
NetIC11_14: IC11.14 R28.1 | length 253.2
  Bottom Layer w15.75: IC11.14@2575,3192.52 2575,3279.63 2625,3329.63 R28.1
NetIC11_15: IC11.15 R27.1 | length 273.9
  Bottom Layer w15.75: IC11.15@2625,3192.52 2625,3254.63 2725,3354.63 R27.1
NetIC11_16: IC11.16 R26.1 | length 294.6
  Bottom Layer w15.75: IC11.16@2675,3192.52 2675,3229.63 2825,3379.63 R26.1
NetIC12_10: IC12.10 R39.1 | length 319.6
  Bottom Layer w15.75: R39.1 326.57,3379.63 476.57,3229.63 IC12.10
NetIC12_11: IC12.11 R38.1 | length 298.9
  Bottom Layer w15.75: R38.1 426.57,3354.63 526.57,3254.63 IC12.11
NetIC12_12: IC12.12 R37.1 | length 278.2
  Bottom Layer w15.75: R37.1 526.57,3329.63 576.57,3279.63 IC12.12
NetIC12_13: IC12.13 R36.1 | length 257.5
  Bottom Layer w15.75: IC12.13 R36.1
NetIC12_14: IC12.14 R35.1 | length 278.2
  Bottom Layer w15.75: IC12.14 676.57,3279.63 726.57,3329.63 R35.1
NetIC12_15: IC12.15 R34.1 | length 298.9
  Bottom Layer w15.75: IC12.15 726.57,3254.63 826.57,3354.63 R34.1
NetIC12_16: IC12.16 R33.1 | length 319.6
  Bottom Layer w15.75: IC12.16 776.57,3229.63 926.57,3379.63 R33.1
NetIC13_1: IC13.1 R30.2 | length 1351.8
  Top Layer w15.75: IC13.1@1626.57,3025 1626.57,3500 1676.57,3550 v1@2426.57,3550
  Bottom Layer w15.75: R30.2 v1(2425,3550)
NetIC13_2: IC13.2 R29.2 | length 1346.4
  Top Layer w15.75: IC13.2@1726.57,3025 1726.57,3450 1776.57,3500 2517.35,3500 2526.57,3509.22 v1@2526.57,3550
  Bottom Layer w15.75: R29.2 v1(2525,3550)
NetIC13_4: IC13.4 R28.2 | length 1270.3
  Top Layer w15.75: IC13.4@1926.57,3025 1926.57,3440.78 1935.8,3450 2617.35,3450 2626.57,3459.22 v1@2626.57,3550
  Bottom Layer w15.75: R28.2 v1(2625,3550)
NetIC13_6: IC13.6 R27.2 | length 800.9
  Bottom Layer w15.75: IC13.6@2026.57,3625 2675,3625 2726.57,3573.43 R27.2@2726.57,3493.9
NetIC13_7: IC13.7 R26.2 | length 1116.2
  Bottom Layer w15.75: IC13.7@1926.57,3625 1926.57,3690.78 1935.8,3700 2725,3700 2826.57,3598.43 R26.2@2826.57,3493.9
NetIC13_9: IC13.9 R31.2 | length 719.6
  Bottom Layer w15.75: IC13.9@1726.57,3625 1726.57,3559.22 1735.8,3550 2317.35,3550 2325,3542.35 R31.2
NetIC13_10: IC13.10 R32.2 | length 684.5
  Bottom Layer w15.75: IC13.10@1626.57,3625 1626.57,3573.43 1706.1,3493.9 R32.2@2226.57,3493.9
NetIC14_1: IC14.1 R37.2 | length 1161.1
  Top Layer w15.75: v1(526.57,3550) 526.57,3475 551.58,3450 1117.35,3450 1126.57,3440.78 IC14.1
  Bottom Layer w15.75: R37.2 v1(526.57,3550)
NetIC14_2: IC14.2 R36.2 | length 1150.1
  Top Layer w15.75: v1(626.57,3550) 626.57,3509.22 635.8,3500 1182.81,3500 1226.57,3456.23 IC14.2
  Bottom Layer w15.75: R36.2 v1(626.57,3550)
NetIC14_4: IC14.4 R35.2 | length 1251.8
  Top Layer w15.75: v1(726.57,3550) 1376.57,3550 1426.57,3500 IC14.4
  Bottom Layer w15.75: R35.2 v1(726.57,3550)
NetIC14_6: IC14.6 R34.2 | length 936.8
  Bottom Layer w15.75: R34.2 826.57,3524.41 836.42,3534.25 1360.83,3534.25 1376.58,3550 1376.58,3675 1401.57,3700 1501.57,3700 1526.57,3675 IC14.6
NetIC14_7: IC14.7 R33.2 | length 612.9
  Bottom Layer w15.75: R33.2 1395.47,3493.9 1426.57,3525 IC14.7
NetIC14_9: IC14.9 R38.2 | length 949.9
  Bottom Layer w15.75: R38.2 426.57,3550 476.57,3600 1050,3600 1088.19,3561.81 1216.54,3561.81 1226.57,3571.85 IC14.9
NetIC14_10: IC14.10 R39.2 | length 890.2
  Bottom Layer w15.75: R39.2 326.57,3551.57 402.56,3627.56 1049.18,3627.56 1124.02,3627.56 IC14.10
NetR7_2: R7.2 R8.1 | length 470.1
  Bottom Layer w15.75: R8.1 2295.27,906.3 2476.57,725 R7.2
NetR8_2: R8.2 R9.1 | length 230.3
  Bottom Layer w15.75: R8.2 2559.72,825 R9.1@2675,825
NetR12_2: R12.2 R18.1 R19.2 | length 181.1
  Bottom Layer w15.75: R12.2 R18.1 R19.2
NetR13_2: R13.2 R19.1 R20.2 | length 284.1
  Bottom Layer w15.75: R13.2 1345.47,1813.58 1359.05,1800 1426.57,1800 ; R20.2 1426.57,1800 ; R19.1 1495.47,1813.58 1481.89,1800 1426.57,1800
NetR14_2: R14.2 R20.1 R21.2 | length 284.1
  Bottom Layer w15.75: R14.2 1345.47,1713.58 1359.05,1700 1426.57,1700 ; R21.2 1426.57,1700 ; R20.1 1495.47,1713.58 1481.89,1700 1426.57,1700
NetR15_2: R15.2 R21.1 R22.2 | length 284.1
  Bottom Layer w15.75: R15.2 1345.47,1613.58 1359.05,1600 1426.57,1600 ; R22.2 1426.57,1600 ; R21.1 1495.47,1613.58 1481.89,1600 1426.57,1600
NetR16_2: R16.2 R22.1 R23.2 | length 292
  Bottom Layer w15.75: R16.2 1345.47,1513.58 1359.06,1500 1495.47,1500 ; R23.2 1495.47,1500 ; R22.1 1495.47,1500
PWM: IC9.4 IC10.4 J1.2 J2.2 TP3.0 | length 3233
  Top Layer w15.75: IC10.4 826.57,2513.81 876.74,2563.98 2087.6,2563.98 IC9.4 2601.57,2050 2601.57,1480.68 v1(2604.41,1477.84)
  Bottom Layer w15.75: v1(2604.41,1477.84) 2607.25,1475 2698.86,1475 ; J2.2 J1.2 2745.47,1428.39 2698.86,1475 ; TP3.0 2698.86,1475
TEMP: IC3.1 IC3.2 IC5.6 TP4.0 | length 1919.5
  Top Layer w15.75: v1(1001.57,1075) 1101.58,1075 1126.57,1050 1126.57,925 1151.57,900 v1(2176.57,900)
  Bottom Layer w15.75: IC3.1 IC3.2 v1(1001.57,1075) TP4.0@1151.57,1075 ; v1(2176.57,900) 2133.07,943.5 2133.07,1015.77 2142.3,1025 IC5.6
VCC: C6.2 C7.A C8.2 C9.2 C10.2 C11.2 C12.2 C13.2 C14.2 C15.2 C16.2 IC1.1 IC2.4 IC2.8 IC3.8 IC5.8 IC6.14 IC7.14 IC8.14 IC9.3 IC9.16 IC10.3 IC10.16 IC11.9 IC12.9 IC13.A IC14.A J1.1 L1.2 R1.2 R7.1 R11.1 TP6.0 | length 20410.4
  Bottom Layer w23.62: 176.57,845.56 297.13,725 1150,725 1248.03,823.03 1473.03,823.03 1475,825 ; C8.2 325,3167.52 ; IC12.9 325,3167.52 ; IC10.16 526.57,2643.77 ; IC3.8@662.9,1125 C16.2 299.71,1200.29 176.57,1323.43 ; IC6.14 300,1850 176.57,1726.57 ; IC10.3 726.57,2375 686.36,2334.78 491.79,2334.78 465.41,2361.16 465.41,2463.84 526.57,2525 C11.2 526.57,2643.77 ; C13.2 744.09,2007.48 662.15,2089.43 664.06,2091.34 ; IC1.1 295.28,554.72 176.57,673.43 176.57,845.56 176.57,1323.43 ; IC14.A@1326.57,3625 1326.57,3700 1301.57,3725 426.57,3725 176.57,3475 176.57,3050 ; C10.2 1376.57,2875 1326.57,2925 ; IC2.8 1500.39,1125 1536.81,1088.58 ; IC7.14 1469.29,2682.28 1326.57,2825 ; C15.2 1536.81,1088.58 ; R11.1 1751.58,525 1851.58,425 1999.57,425 ; R1.2 IC2.4 1625,975 1536.81,886.81 ; C7.A 2030.67,393.9 1999.57,425 ; IC9.3 2126.57,2475 2101.57,2500 1940.41,2500 1926.57,2513.84 C9.2 IC9.16 1926.57,2825 1826.57,2925 1826.57,3167.52 ; L1.2 2151.57,450 2176.57,425 ; C14.2 2151.57,1250 2101.57,1200 2101.57,1150 ; C6.2 2250,3167.52 ; IC5.8 2126.57,1125 2101.57,1150 ; IC8.14 2269.29,1917.72 2301.57,1950 C12.2 ; IC11.9 2250,3167.52 ; TP6.0 2501.57,425 ; J1.1 2676.57,1373.43 2625,1425 2400,1425 2344.09,1480.91 C12.2 ; R7.1 2745.47,543.9 2626.57,425 2501.57,425 ; 176.57,1323.43 176.57,1726.57 ; 176.57,1726.57 176.57,1976.57 ; 176.57,1976.57 291.34,2091.34 664.06,2091.34 ; 176.57,1976.57 176.57,3050 ; 176.57,3050 294.09,3167.52 325,3167.52 ; 526.57,2643.77 1270.34,2643.77 1326.57,2700 1326.57,2825 ; 664.06,2091.34 2296.4,2091.34 2344.09,2043.64 C12.2 ; 1326.57,2825 1326.57,2925 ; 1326.57,2925 1326.57,3025 1326.57,3100 1394.09,3167.52 1826.57,3167.52 ; 1475,825 1536.81,886.81 ; 1475,825 2026.57,825 ; 1536.81,886.81 1536.81,1088.58 ; 1826.57,3167.52 2250,3167.52 ; 1999.57,425 2176.57,425 ; 2026.57,825 2101.57,900 2101.57,1150 ; 2026.57,825 2301.57,825 2351.57,775 2351.57,475 2401.57,425 ; 2176.57,425 2401.57,425 ; 2401.57,425 2501.57,425
Vin: C2.A IC4.6 R6.2 XP1.V | length 864.7
  Bottom Layer w23.62: R6.2 1351.57,512.16 1401.57,462.16 ; C2.A 1475,325 ; IC4.6 1415.41,650 1401.57,636.16 1401.57,462.16 ; XP1.V 1475,325 ; 1401.57,462.16 1475,388.73 1475,325
pads on no net: IC6.8 IC8.11 IC8.12 IC8.13 IC13.5 IC14.5

## Keep-outs
Keep-Out Layer:
  the board outline again, w50

## Silkscreen, mask and mechanical layers (free items; w line width, h text height)
Top Overlay:
  drawing of 7 lines, arcs and shapes, not listed
  text "Directed in / COLLEGE OF ELECTRONICS" at 950.36,825 h60